# Altium PCB WEB_PCB.PcbDoc (part 2 of 2)
Units mil, origin at the board's own origin, x right, y up, seen from the top; angles counter-clockwise.
Board outline 3858.27 x 2755.91 mil, 2 copper layers (Top Layer, Bottom Layer); 107 components, 108 nets, 503 pads, 381 vias.
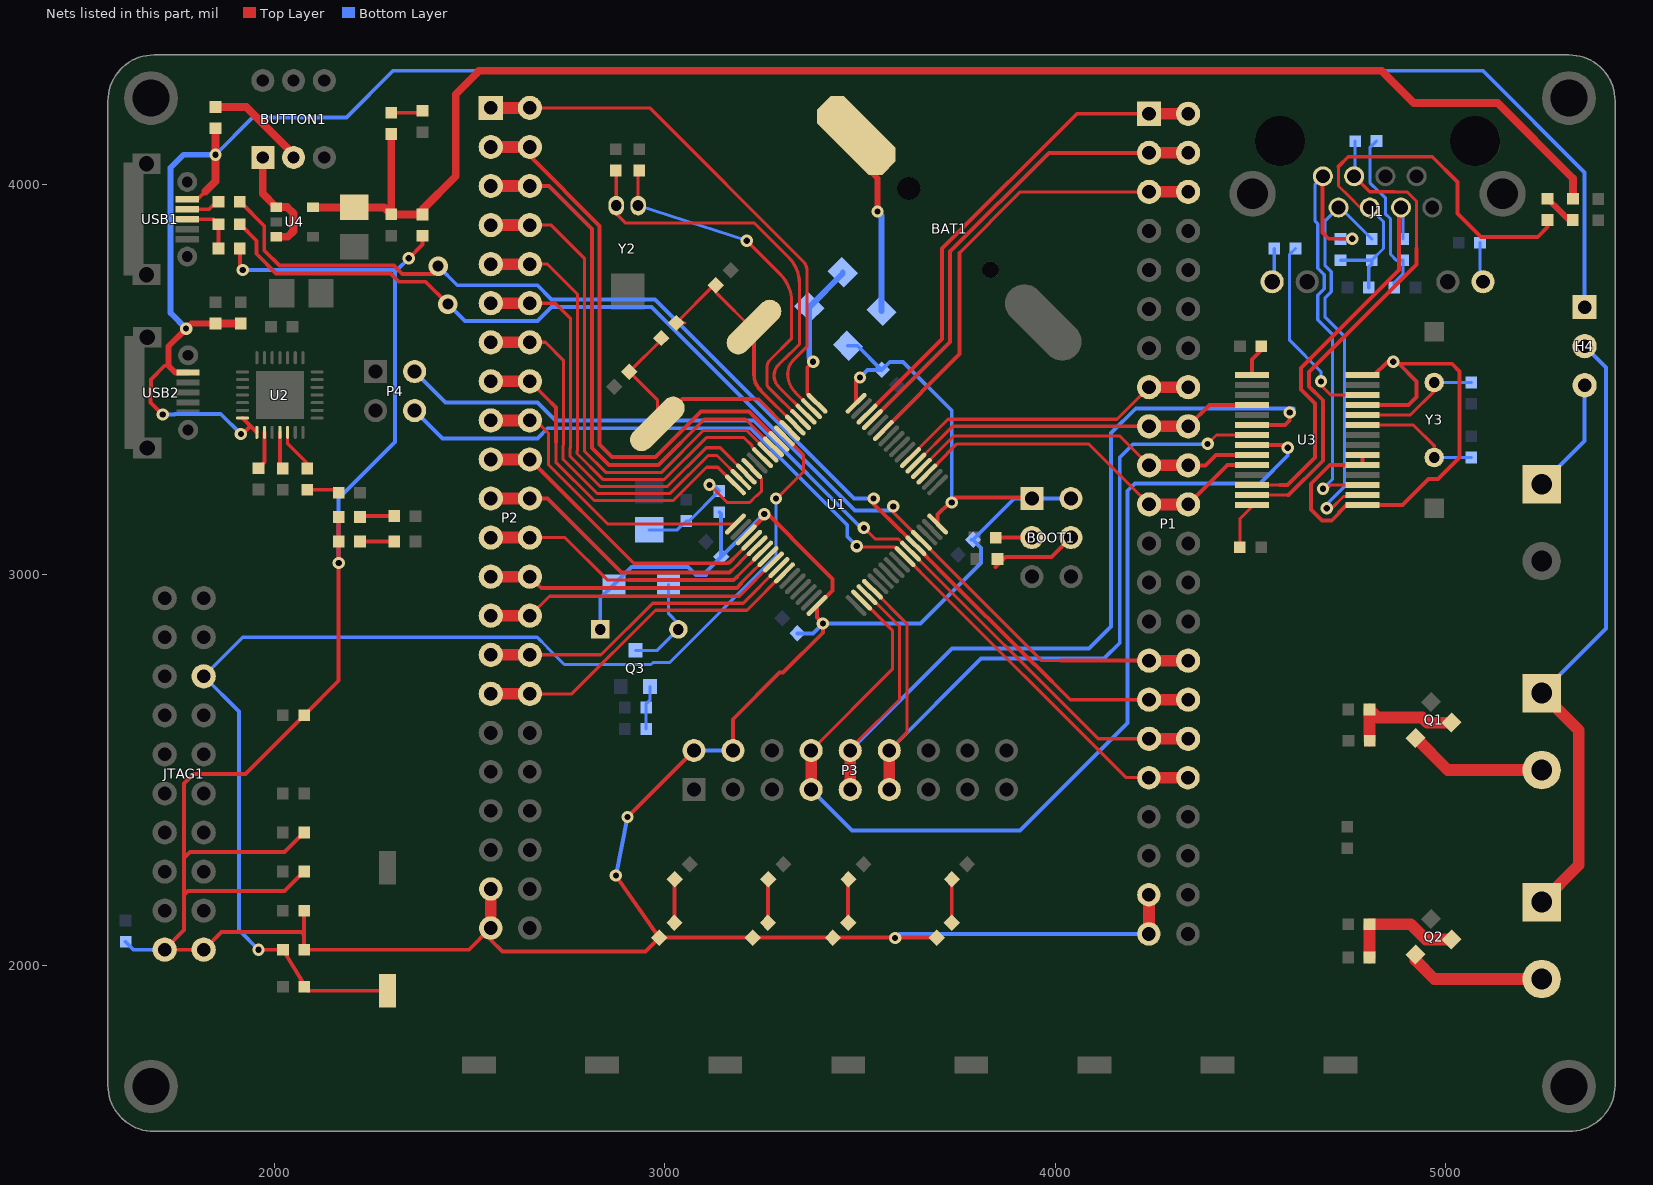
[diagram p2: the nets of this part, all layers, seen from the top]

## Via types
v1: diameter 31.5, hole 15.75, Top Layer to Bottom Layer, 370 vias
v2: diameter 19.68, hole 7.87, Top Layer to Bottom Layer, 9 vias
v3: diameter 50, hole 28, Top Layer to Bottom Layer, 2 vias

## Nets (pads, with @x,y where several pads share a name; then routed paths per layer and width w, separated by ;. In a path a pad name is that pad's centre, name@x,y a point inside that pad or via, vN(x,y) a via of type N, cw(c..) or ccw(c..) an arc to the next point about the centre after c; other vN are vias at no path point) (continued)
LEDB: R31.2 U3.26 | length 506.5
  Top Layer w8: v1(4680,3495) 4680,3485 4705,3460 4786.57,3460 U3.26@4786.73,3460.16
  Bottom Layer w8: R31.2@4615,3835 4600,3820 4600,3600 4680,3520 v1(4680,3495)
NET_INT: P1.17 P1.18 U1.53 U3.4 | length 921.7
  Top Layer w8: U1.53@3643.22,3285.79 3737.44,3380 P1.17@4240,3380
  Top Layer w10: P1.18@4340,3380 4394.57,3434.57 U3.4@4503.27,3434.57
  Top Layer w30: P1.17@4240,3380 P1.18@4340,3380
NET_RST: P1.21 P1.22 U1.51 U3.10 | length 971.3
  Top Layer w8: U1.51@3671.06,3257.95 3672.95,3257.95 3698.87,3283.87 3698.87,3285.74 3748.13,3335 4085,3335 P1.21@4240,3180
  Top Layer w10: P1.22@4340,3180 4441.02,3281.02 U3.10@4503.27,3281.02
  Top Layer w30: P1.21@4240,3180 P1.22@4340,3180
NET_SPI_CS: P1.19 P1.20 U1.52 U3.9 | length 922.6
  Top Layer w8: U1.52@3657.14,3271.87 3740.27,3355 4165,3355 P1.19@4240,3280
  Top Layer w10: P1.20@4340,3280 4385,3280 4411.61,3306.61 U3.9@4503.27,3306.61
  Top Layer w30: P1.19@4240,3280 P1.20@4340,3280
NET_SPI_MISO: P3.9 P3.10 U1.35 U3.6 | length 2511.1
  Top Layer w8: P3.10@3475,2550 3475,2555 3495.53,2575.53 3495.98,2575.53 3601,2680.54 3601,2868.27 3520.33,2948.94 U1.35@3517.95,2948.94
  Top Layer w10: U3.6@4503.27,3383.39 4588.39,3383.39 4600,3395 v1(4600,3415)
  Top Layer w30: P3.9@3475,2450 P3.10@3475,2550
  Bottom Layer w10: P3.10@3475,2550 3736,2811 4086,2811 4142.5,2867.5 4142.5,3362.5 4206,3426 4359.05,3426 4360.05,3425 4610,3425 v1(4600,3415)
NET_SPI_MOSI: P3.11 P3.12 U1.36 U3.7 | length 2109.1
  Top Layer w8: U1.36@3531.87,2962.86 3620,2874.73 3620,2595 P3.12@3575,2550 ; v1(4390,3335) 4412.8,3357.8 U3.7@4503.27,3357.8
  Top Layer w30: P3.11@3575,2450 P3.12@3575,2550
  Bottom Layer w10: P3.12@3575,2550 3810,2785 4125,2785 4165,2825 4165,3300 4199,3334 4389,3334 v1(4390,3335)
NET_SPI_SCK: P3.7 P3.8 U1.34 U3.8 | length 2729.1
  Top Layer w8: P3.8@3375,2550 3583,2758 3583,2857.46 3505.44,2935.02 U1.34@3504.03,2935.02
  Top Layer w10: U3.8@4503.27,3332.2 4587.8,3332.2 v1(4595,3325)
  Top Layer w30: P3.7@3375,2450 P3.8@3375,2550
  Bottom Layer w10: P3.7@3375,2450 3480,2345 3910,2345 4185,2620 4185,3215 4204,3234 4524,3234 4595,3305 v1(4595,3325)
NetBAT1_1: BAT1.1 D1.1 | length 476.2
  Top Layer w15: BAT1.1@3490.54,4124.46 3490.54,4069.46 3545,4015 v1(3545,3930)
  Bottom Layer w15: v1(3545,3930) 3555,3920 D1.1@3555,3675
NetBEEP1_2: BEEP1.2 D3.1 Q3.3 | length 242.6
  Bottom Layer w8: Q3.3@2925,2806.26 2981.26,2806.26 BEEP1.2@3035,2860 ; D3.1@3010,2975 3010,2900 BEEP1.2@3035,2875
NetBOOT1_3: BOOT1.3 R6.2 | length 92.5
  Top Layer w10: R6.2@3847.5,3094.94 3847.56,3095 BOOT1.3@3940,3095
NetBOOT1_4: BOOT1.4 R8.1 | length 224.1
  Top Layer w10: 3847,3020 3872,3045 3990,3045 BOOT1.4@4040,3095
NetBUTTON1_1: BUTTON1.1 U4.1 U4.3 | length 287.4
  Top Layer w20: BUTTON1.1@1971.26,4068.15 1971.26,3975.74 U4.1@2006,3941 2034,3941 2050,3925 2050,3880 2035,3865 U4.3@2006,3865
NetBUTTON1_2: BUTTON1.2 F1.2 | length 258.6
  Top Layer w20: F1.2@1850.06,4197.5 1929.25,4197.5 2050,4076.75 BUTTON1.2@2050,4068.15
NetC13_2: C13.2 U3.1 | length 83.6
  Top Layer w10: U3.1@4503.27,3511.34 4503.27,3550.77 4527.5,3575 C13.2@4527.5,3584.94
NetC18_1: C18.1 U3.24 Y3.2 | length 325.6
  Top Layer w8: U3.24@4786.73,3408.98 4908.98,3408.98 4970,3470 Y3.2@4970,3492.13
  Bottom Layer w8: Y3.2@4970,3492.13 4970.13,3492 C18.1@5064.87,3492
NetC19_1: C19.1 U3.23 Y3.1 | length 330.4
  Top Layer w8: U3.23@4786.73,3383.39 4916.61,3383.39 4970,3330 Y3.1@4970,3300
  Bottom Layer w8: Y3.1@4970,3300 C19.1@5065,3300
NetC20_2: C20.2 J1.4 L2.1 R20.1 R21.1 | length 1173.8
  Top Layer w8: 4725,4045 4725,3995 4740.41,3979.59 4741.4,3979.59 4764.59,3956.4 4764.59,3955.41 4780,3940 J1.4@4805,3940
  Top Layer w10: 4725,4045 4750,4070 4965,4070 5030,4005 5030,3925 5090,3865 5235,3865 5260,3890 L2.1@5260,3908
  Bottom Layer w8: R20.1@4730,3805 R21.1@4810,3805 4840,3835 4840,3903.55 4805,3938.55 J1.4@4805,3940
  Bottom Layer w10: C20.2@4802.5,3735.06 4802.5,3787.5 4810,3795 R21.1@4810,3805
NetC21_2: C21.2 R22.1 R23.1 | length 436.8
  Bottom Layer w8: R22.1@4822,4110 4805.41,4093.41 4805.41,4003.6 4828.6,3980.41 4829.59,3980.41 4845,3965 4845,3924.01 4858,3911.01 4858,3820 4873,3805 R23.1@4890,3805 4890,3770 4867.5,3747.5 C21.2@4867.5,3735
NetH1_1: H1.1 H3.1 H4.2 | length 1593
  Top Layer w30: H3.1@5245,2161.85 5340,2256.85 5340,2601.85 H1.1@5245,2696.85
  Bottom Layer w10: H1.1@5245,2696.85 5410,2861.85 5410,3530 H4.2@5355,3585
NetH1_2: H1.2 Q1.3 | length 356.8
  Top Layer w30: Q1.3@4922.29,2582.29 5004.58,2500 H1.2@5245,2500
NetH2_1: H2.1 H4.3 | length 298.7
  Bottom Layer w10: H2.1@5245,3231.85 5355,3341.85 H4.3@5355,3485
NetH3_2: H3.2 Q2.3 | length 357.1
  Top Layer w30: Q2.3@4922.29,2027.29 4922.29,2012.71 4970,1965 H3.2@5245,1965
NetJ1_9: J1.9 R31.1 | length 87.2
  Bottom Layer w8: J1.9@4555,3750 4560.5,3755.5 R31.1@4560.5,3834.94
NetJ1_12: J1.12 R30.1 | length 103.3
  Bottom Layer w8: R30.1@5087,3850 5087,3758 J1.12@5095,3750
NetL2_2: L2.2 R25.1 | length 87.6
  Top Layer w15: L2.2@5260.06,3962.5 5260.25,3962.5 5292.5,3930.25 5292.5,3930.06 5314.56,3908 R25.1@5324.94,3908
NetLED1_1: LED1.1 R15.2 | length 83.6
  Top Layer w10: R15.2@2084.94,3217.5 2153.13,3217.5 2160.5,3210.13 LED1.1@2165.5,3210.13
NetLED2_2: LED2.2 R17.2 | length 87.5
  Top Layer w10: LED2.2@2220,3085 2307.44,3085 R17.2@2307.5,3085.06
NetLED3_2: LED3.2 R18.2 | length 87.5
  Top Layer w10: LED3.2@2220,3150 2307.44,3150 R18.2@2307.5,3150.06
NetLED4_2: LED4.2 R35.2 | length 111.4
  Top Layer w10: LED4.2@3025,2109.4 3025,2220.09 R35.2@3025.51,2220.6
NetLED5_2: LED5.2 R36.2 | length 111.6
  Top Layer w10: LED5.2@3264.49,2109.4 3264.49,2219.58 R36.2@3265.51,2220.6
NetLED6_2: LED6.2 R37.2 | length 111.6
  Top Layer w10: LED6.2@3469.49,2109.4 3469.49,2219.58 R37.2@3470.51,2220.6
NetLED7_2: LED7.2 R38.2 | length 111.4
  Top Layer w10: LED7.2@3735,2109.4 3735,2220.09 R38.2@3735.51,2220.6
NetLED8_2: LED8.2 R39.2 | length 82.1
  Top Layer w10: LED8.2@2300.06,4182.5 2375.06,4182.5 R39.2@2380.06,4187.5
NetQ1_1: Q1.1 R24.1 R27.2 | length 303.9
  Top Layer w30: R27.2@4805,2574.94 4804.5,2575.44 R24.1@4804.5,2655 4825.19,2634.31 4939.31,2634.31 4952.36,2621.26 Q1.1@5014.16,2621.26
NetQ2_1: Q2.1 R28.1 R29.1 | length 310.7
  Top Layer w30: R29.1@4804.5,2020 R28.1@4804.5,2105 4910,2105 4948.74,2066.26 Q2.1@5014.16,2066.26
NetQ3_1: Q3.1 R33.2 R34.2 | length 112.8
  Bottom Layer w8: R33.2@2952.5,2605.06 R34.2@2952.5,2660.06 2952.5,2670 2962.4,2679.9 Q3.1@2962.4,2713.74
NetR10_1: R10.1 USB1.2 | length 90.3
  Top Layer w10: USB1.2@1777.8,3935.59 1833.59,3935.59 R10.1@1858,3960
NetR11_1: R11.1 R13.1 USB1.3 | length 147.9
  Top Layer w10: USB1.3@1777.8,3910 1845.5,3910 R11.1@1858,3897.5 R13.1@1858,3835
NetR12_2: R12.2 U3.14 | length 121.3
  Top Layer w8: R12.2@4472.5,3070.06 4472.5,3142.5 4503.27,3173.27 U3.14@4503.27,3178.66
NetR14_2: R14.2 U2.9 | length 98.5
  Top Layer w10: R14.2@1960.06,3272.5 1975.63,3288.07 U2.9@1975.63,3364.53
NetR15_1: R15.1 U2.12 | length 113.4
  Top Layer w8: U2.12@2034.68,3364.53 2034.68,3335.32 2085,3285 R15.1@2085,3272
NetR16_1: R16.1 U2.11 | length 95.7
  Top Layer w10: U2.11@2015,3364.53 2015,3279.56 R16.1@2022.56,3272
OSC32_IN: C3.2 U1.3 Y2.2 | length 1065.8
  Top Layer w8: C3.2@2875,4035 2876,4034 Y2.2@2876,3945 2876,3924 2900,3900 3230,3900 3316.72,3813.28 cw(c3248.43,3745) 3345,3745 3345,3590 3320.86,3565.86 3320.04,3565.86 3291.56,3537.38 ccw(c3319.48,3509.47) 3280,3509.47 ccw(c3319.48,3509.47) 3291.56,3481.55 U1.3@3362.05,3411.06
OSC32_OUT: C4.2 U1.4 Y2.1 | length 1053.8
  Top Layer w8: Y2.1@2932,3945 2932,4032 C4.2@2935,4035 ; v1(3210,3855) 3295.71,3769.29 cw(c3225,3698.58) 3325,3698.58 3325,3605 3269.64,3549.64 ccw(c3289.28,3530) 3261.5,3530 3261.5,3489.1 ccw(c3274.38,3489.1) 3265.27,3480 U1.4@3348.13,3397.14
  Bottom Layer w8: Y2.1@2932,3945 v1(3210,3855)
OSC_IN: C1.2 R7.2 U1.5 Y1.2 | length 611.8
  Top Layer w8: 3051.66,3644.4 R7.2@3029.49,3644.4 3125.69,3740.6 C1.2@3130.51,3740.6 3130.51,3723.25 3228.76,3625 Y1.2@3228.76,3634 ; 3245,3472.44 U1.5@3334.21,3383.22
  Top Layer w10: Y1.2@3228.76,3625 3228.76,3511.64 ccw(c3284.2,3511.64) 3245,3472.44
OSC_OUT: C2.2 R7.1 U1.6 Y1.1 | length 682.3
  Top Layer w8: C2.2@2909.45,3519.35 2990.91,3600.82 R7.1@2990.91,3605.91 ; C2.2@2909.49,3519.31 2981.24,3447.56 Y1.1@2981.24,3386 ; 3220,3450 3239.6,3450 U1.6@3320.29,3369.3
  Top Layer w10: Y1.1@2981.24,3386 3045.24,3450 3220,3450
PA0: P2.11 P2.12 U1.14 | length 1125.4
  Top Layer w8: P2.12@2655,3695 2720,3695 2758.55,3656.45 2758.55,3324.67 2757.55,3323.67 2757.55,3302.9 2834.35,3226.1 3007.17,3226.1 3106.07,3325 3141.89,3325 U1.14@3208.94,3257.95
  Top Layer w30: P2.11@2555,3695 P2.12@2655,3695
PA1: P2.13 P2.14 U1.15 | length 1015.9
  Top Layer w8: P2.14@2655,3595 2695,3595 2740.55,3549.45 2740.55,3332.13 2739.55,3331.13 2739.55,3295.44 2826.89,3208.1 3014.63,3208.1 3111.52,3305 3134.05,3305 U1.15@3195.02,3244.03
  Top Layer w30: P2.13@2555,3595 P2.14@2655,3595
PA2: P2.15 P2.16 U1.16 | length 888.4
  Top Layer w8: P2.16@2655,3495 2710,3440 ; 2721.55,3340 2721.55,3287.99 2819.43,3190.1 3022.08,3190.1 3106.98,3275 3136.21,3275 U1.16@3181.1,3230.11
  Top Layer w10: 2710,3440 2721.55,3428.45 2721.55,3340
  Top Layer w30: P2.15@2555,3495 P2.16@2655,3495
PA3: P2.17 P2.18 U1.17 | length 783.3
  Top Layer w8: P2.18@2655,3395 2670,3395 2702.55,3362.45 2702.55,3281.53 2854.19,3129.89 U1.17@3181.1,3129.89
  Top Layer w30: P2.17@2555,3395 P2.18@2655,3395
PA4: P2.19 P2.20 U1.20 | length 802.3
  Top Layer w8: 3174.54,3040 3222.68,3088.13 U1.20@3222.86,3088.13
  Top Layer w10: P2.20@2655,3295 2920.75,3029.25 3161.15,3029.25 3162.9,3031 3165.54,3031 3174.54,3040
  Top Layer w30: P2.19@2555,3295 P2.20@2655,3295
PA5: P2.21 P2.22 U1.21 | length 789.7
  Top Layer w8: 3171.18,3011 3172.41,3011 3193.54,3032.13 3193.54,3033.36 3234.39,3074.21 U1.21@3236.78,3074.21
  Top Layer w10: P2.22@2655,3195 2700,3195 2889.75,3005.25 2890.5,3006 3166.18,3006 3171.18,3011
  Top Layer w30: P2.21@2555,3195 P2.22@2655,3195
PA6: P2.23 P2.24 U1.22 | length 771.6
  Top Layer w8: P2.24@2655,3095 2745,3095 2854,2986 2908.85,2986 ; 3185,2994.6 U1.22@3250.7,3060.29
  Top Layer w10: 2908.85,2986 3176.4,2986 3185,2994.6
  Top Layer w30: P2.23@2555,3095 P2.24@2655,3095
PA7: P2.25 P2.26 U1.23 | length 755.6
  Top Layer w8: 3195,2977.73 3204,2986.73 3204,2987.19 3263.18,3046.37 U1.23@3264.62,3046.37
  Top Layer w10: P2.26@2655,2995 2684,2966 3184.69,2966 3195.71,2977.02
  Top Layer w30: P2.25@2555,2995 P2.26@2655,2995
PA9: P1.35 P1.36 P4.4 U1.42 | length 2409.9
  Top Layer w8: v1(3491.88,3073.12) 3493.76,3071.24 3588,3071.24 3603.18,3056.06 3608.08,3056.06 3612.87,3051.27 3612.87,3047.94 3613.82,3047.94 U1.42@3615.38,3046.37 3633.43,3028.32 3633.57,3028.32 3654.66,3007.24 3654.66,3007.1 4181.33,2480.43 P1.35@4239.57,2480.43
  Top Layer w30: P1.35@4239.57,2480.43 P1.36@4339.57,2480.43
  Bottom Layer w10: P4.4@2360,3420 2431,3349 2674.05,3349 2700.05,3375 3220,3375 3467.5,3127.5 3467.5,3097.5 v1(3491.88,3073.12)
PA10: P1.33 P1.34 P4.2 U1.43 | length 2369.5
  Top Layer w8: v1(3510,3120) 3538.76,3091.24 3598.67,3091.24 3619.14,3070.77 3619.14,3070.45 U1.43@3629.3,3060.29 4109.6,2580 P1.33@4240,2580
  Top Layer w30: P1.33@4240,2580 P1.34@4340,2580
  Bottom Layer w10: P4.2@2360,3520 2439,3441 2674.05,3441 2720.05,3395 3228.28,3395 3503.28,3120 v1(3510,3120)
PA11: P1.31 P1.32 R10.2 U1.44 | length 2998.7
  Top Layer w10: R10.2@1912.5,3954.94 1975,3892.44 1975,3830 2013.58,3791.42 2306.87,3791.42 2328.28,3770 v3@2410,3770 ; v1(3535,3195) 3535,3181.52 3572.26,3144.25 3573.18,3144.25 U1.44@3643.22,3074.21 ; U1.44@3642.9,3073.88 3701.47,3015.31 3701.47,3015 3946.47,2770 3948.28,2770 4038.28,2680 P1.31@4240,2680
  Top Layer w30: P1.31@4240,2680 P1.32@4340,2680
  Bottom Layer w10: v3(2420,3790) 2469,3741 2674.05,3741 2710.05,3705 2974.85,3705 3484.85,3195 v1(3535,3195)
PA12: P1.29 P1.30 R11.2 U1.45 | length 2963
  Top Layer w8: v1(3585,3175) 3585,3160.27 U1.45@3657.14,3088.13 3965.27,2780 4015,2780
  Top Layer w10: R11.2@1912.5,3897.44 1955,3854.94 1955,3821.72 2005.3,3771.42 2298.58,3771.42 2320,3750 2387.5,3750 v3(2445,3692.5) ; 4015,2780 P1.29@4240,2780
  Top Layer w30: P1.29@4240,2780 P1.30@4340,2780
  Bottom Layer w10: v3(2445,3692.5) 2488.5,3649 2674.05,3649 2710.05,3685 2966.57,3685 3487.32,3164.25 3584.25,3164.25 3585,3165 v1(3585,3175)
PB0: P2.31 P2.32 U1.26 | length 879.6
  Top Layer w8: P2.32@2655,2695 2762.5,2695 2976.5,2909 3210.76,2909 U1.26@3306.37,3004.62
  Top Layer w30: P2.31@2555,2695 P2.32@2655,2695
PB7: P1.5 P1.6 U1.59 | length 1185.5
  Top Layer w8: 3755.08,3823.16 3755.08,3824.58 3910.5,3980 P1.5@4240,3980
  Top Layer w10: U1.59@3559.71,3369.3 3755.08,3564.68 3755.08,3823.16
  Top Layer w30: P1.5@4240,3980 P1.6@4340,3980
PB8: P1.3 P1.4 U1.61 | length 1226.6
  Top Layer w8: U1.61@3531.87,3397.14 U1.61@3532.31,3397.14
  Top Layer w10: U1.61@3532.31,3397.14 3730.89,3595.72 3730.89,3827.25 3983.63,4080 P1.3@4240,4080
  Top Layer w30: P1.3@4240,4080 P1.4@4340,4080
PB9: P1.1 P1.2 U1.62 | length 1276.2
  Top Layer w10: U1.62@3517.95,3411.06 3710,3603.11 3710,3834.65 4055.35,4180 P1.1@4240,4180
  Top Layer w30: P1.1@4240,4180 P1.2@4340,4180
PC0: P2.3 P2.4 U1.8 | length 1488.2
  Top Layer w10: P2.4@2655,4095 2655,4071.72 2833.55,3893.16 2833.55,3332.96 2865.41,3301.1 2976.1,3301.1 3093,3418 3215.92,3418 U1.8@3292.45,3341.47
  Top Layer w30: P2.3@2555,4095 P2.4@2655,4095
PC1: P2.5 P2.6 U1.9 | length 1425
  Top Layer w8: 3173,3398 3207,3398 3277.45,3327.55 U1.9@3278.53,3327.55
  Top Layer w10: P2.6@2655,3995 2703.43,3995 2813.55,3884.88 2813.55,3324.68 2857.13,3281.1 2984.39,3281.1 3101.28,3398 3173,3398
  Top Layer w30: P2.5@2555,3995 P2.6@2655,3995
PC2: P2.7 P2.8 U1.10 | length 1328.9
  Top Layer w8: P2.8@2655,3895 2710,3895 2794.55,3810.45 2794.55,3316.81 2849.26,3262.1 2992.26,3262.1 3099.15,3369 3210.54,3369 3264.62,3314.93 U1.10@3264.62,3313.63
  Top Layer w30: P2.7@2555,3895 P2.8@2655,3895
PC3: P2.9 P2.10 U1.11 | length 1232
  Top Layer w8: P2.10@2655,3795 2700,3795 2776.55,3718.45 2776.55,3317.22 2775.55,3316.22 2775.55,3310.35 2841.8,3244.1 2999.71,3244.1 3106.61,3351 3203.09,3351 3223.95,3330.14 3223.95,3326.46 U1.11@3250.7,3299.71
  Top Layer w30: P2.9@2555,3795 P2.10@2655,3795
PC4: P2.27 P2.28 U1.24 | length 780.5
  Top Layer w8: P2.28@2655,2895 2705,2945 3190.65,2945 3278.11,3032.45 U1.24@3278.53,3032.45
  Top Layer w30: P2.27@2555,2895 P2.28@2655,2895
PC5: P2.29 P2.30 U1.25 | length 830
  Top Layer w8: P2.30@2655,2795 2837.04,2795 2969.04,2927 3200.92,2927 U1.25@3292.45,3018.53
  Top Layer w30: P2.29@2555,2795 P2.30@2655,2795
PC13: P2.1 P2.2 U1.2 | length 1421.1
  Top Layer w8: P2.2@2655,4195 2961.85,4195 3354.89,3801.96 cw(c3332.93,3780) 3363.99,3780 3363.99,3583.53 3329.36,3548.9 ; U1.2@3375.97,3424.98 3335,3465.95 cw(c3383.28,3514.24) 3315,3514.24 ; 3315,3514.24 cw(c3364.03,3514.24) 3329.34,3548.88 ; 3315,3514.24 cw(c3364.03,3514.24) 3329.36,3548.9
  Top Layer w30: P2.1@2555,4195 P2.2@2655,4195
PD2: P1.15 P1.16 U1.54 | length 787.3
  Top Layer w8: U1.54@3629.3,3299.71 3629.3,3300.7 3628.61,3301.39 3725.21,3398 4158,3398 P1.15@4240,3480
  Top Layer w30: P1.15@4240,3480 P1.16@4340,3480
RESET: C6.2 JTAG1.15 K1.2 R9.1 U1.7 | length 3169.9
  Top Layer w8: v1(3285,3195) 3287.07,3195 3355,3262.93 3355,3306.76 U1.7@3306.37,3355.38
  Top Layer w10: v1(1960,2040) R9.1@2023,2040 2080.28,1946.64 C6.2@2087.4,1935.04 ; C6.2@2077.5,1944.94 C6.2@2087.4,1935.04 ; K1.2@2290,1935.04 C6.2@2087.4,1935.04
  Bottom Layer w8: JTAG1.15@1820,2740 1920,2840 2673.64,2840 2700,2813.64 2700,2813.13 2743.13,2770 2965,2770 2970,2775 3012.52,2775 3284.75,3047.23 3284.75,3194.75 v1(3285,3195) v1@3284.75,3195
  Bottom Layer w10: JTAG1.15@1820,2740 1910,2650 1910,2090 v1(1960,2040)
TPIN+: J1.3 R22.2 U3.13 | length 1288.4
  Top Layer w8: U3.13@4503.27,3204.25 4595.16,3204.25 ; J1.3@4765,4020 4804.59,3980.41 4867.78,3980.41 4868.6,3979.59 4901.4,3979.59 4924.59,3956.4 4924.59,3835
  Top Layer w10: 4595.16,3204.25 4597.48,3204.25 4685,3291.77 4685,3446.52 4649.25,3482.26 4649.25,3519.25 4924.59,3794.59 4924.59,3835
  Bottom Layer w8: J1.3@4765,4020 4767.5,4022.5 R22.2@4767.5,4109.94
TPIN-: J1.6 R23.2 U3.12 | length 1034
  Top Layer w8: U3.12@4503.27,3229.84 4575,3229.84
  Top Layer w10: 4575,3229.84 4594.79,3229.84 4665,3300.05 4665,3438.23 4629.25,3473.98 4629.25,3529.25 4879.54,3779.54 4879.54,3934.54 J1.6@4885,3940
  Bottom Layer w8: J1.6@4885,3940 4889.94,3935.06 R23.2@4889.94,3859.5
TPOUT+: J1.1 R20.2 U3.17 | length 1213.9
  Top Layer w8: v1(4685.16,3220) 4695.31,3220 4705.16,3229.84 U3.17@4786.73,3229.84
  Top Layer w10: J1.1@4685,4020 4684.41,4020 4684.41,3875.59 4700,3860 v1(4760,3860)
  Bottom Layer w8: J1.1@4685,4020 4665,4000 4665,3905 4672,3898 4672,3784.56 4688.53,3768.03 4688.53,3731.97 4672,3715.44 4672,3652.54 4710,3614.54 4710,3245 4685.16,3220.16 v1(4685.16,3220)
  Bottom Layer w10: R20.2@4729.94,3859.5 4730.44,3860 v1(4760,3860)
TPOUT-: J1.2 R21.2 U3.16 | length 1061.7
  Top Layer w8: v1(4695,3170) 4707.48,3170 4737.63,3200.14 4782.62,3200.14 U3.16@4786.73,3204.25
  Bottom Layer w8: v1(4695,3170) 4695,3180 4740,3225 4740,3610 4690,3660 4690,3707.99 4706.53,3724.51 4706.53,3775.49 4690,3792.01 4690,3905 J1.2@4725,3940 4729.44,3940 R21.2@4809.94,3859.5
VBAT: D1.2 D2.2 U1.1 | length 391.4
  Top Layer w10: v1(3380,3545) 3365,3530 3365,3463.79 U1.1@3389.89,3438.9
  Bottom Layer w15: v1(3380,3545) 3370,3555 D2.2@3370,3685 3456.01,3771.01 D1.2@3456.01,3773.99
VBUS: C15.1 C16.1 F1.1 H4.1 U2.7 U2.8 USB1.1 USB2.1 | length 5616.8
  Top Layer w10: v1(1715,3410) 1684.25,3440.75 1684.25,3477.74 1685,3478.48 1685,3500 1720,3535 1730,3535 ; USB1.1@1777.8,3961.18 1803.9,3961.18 1823.86,3981.14 ; v1(1915,3360) 1919.53,3360 1940,3380.47 ; U2.7@1919.53,3400.94 1940,3380.47 ; U2.8@1955.63,3364.53 1955.63,3364.84 1940,3380.47
  Top Layer w15: USB2.1@1780,3517.36 1747.64,3517.36 1730,3535 1730,3585 v1(1775,3630) 1788,3643 C15.1@1850,3643
  Top Layer w20: 1823.86,3981.14 1850,4007.28 v1(1850,4075.14) F1.1@1850,4143 ; C15.1@1850,3643 C16.1@1915,3643
  Bottom Layer w10: v1(1715,3410) 1745,3410 1746.3,3411.3 1863.7,3411.3 v1(1915,3360) ; v1(1850,4075.14) 1944.86,4170 2185,4170 2305,4290 5095,4290 5355,4030 H4.1@5355,3685
  Bottom Layer w15: v1(1775,3630) 1734.7,3670.3 1734.7,4041.81 1768.04,4075.14 v1(1850,4075.14)
VCC_3V3: BEEP1.1 BOOT1.1 BOOT1.2 C5.1 C7.2 C8.2 C9.2 C10.2 D2.1 D3.2 JTAG1.1 JTAG1.2 L1.2 LED2.1 LED3.1 LED4.1 LED5.1 LED6.1 LED7.1 P1.41 P1.43 P2.41 P2.43 P3.2 P3.4 R2.1 R3.1 R4.1 R5.1 R9.2 R13.2 R26.2 U1.19 U1.32 U1.48 U1.64 | length 10790.4
  Top Layer w10: R13.2@1912.5,3834.94 1912.5,3787.5 v1(1920,3780) ; R2.1@2077,2140 2077,2078 ; R3.1@2077,2240 2076.72,2240 2026.72,2190 1780,2190 1770,2180 ; R4.1@2077,2340 2027,2290 1785,2290 1770,2275 ; LED3.1@2165.5,3147.6 v1(2165.5,3030) 2165.5,2728.5 R5.1@2077,2640 1927,2490 1795,2490 1770,2465 1770,2275 ; v1(2345,3810) 2380,3845 R26.2@2380,3867.5 ; v1(2875,2230) LED4.1@2986.42,2070.91 ; v1(2905,2380) P3.2@3075,2550 ; P3.4@3175,2550 3175,2630 3294.25,2749.25 3302.74,2749.25 3405,2851.52 v1(3405,2875) 3389.89,2890.11 U1.32@3389.89,2921.1 3391.1,2921.1 3430,2960 3430,2988.71 3325,3093.71 3325,3095 3265,3155 v1(3255,3155) 3255,3151.89 3256.89,3150 U1.19@3208.94,3102.05 ; U1.64@3490.11,3438.9 3490.11,3495.11 v1(3500,3505) ; LED7.1@3696.42,2070.91 LED6.1@3430.91,2070.91 LED5.1@3225.91,2070.91 LED4.1@2986.42,2070.91 ; U1.48@3698.9,3129.89 3698.9,3153.9 3730,3185 v1(3735,3185) 3735,3190 3742.75,3197.75 3937.25,3197.75 BOOT1.1@3940,3195 BOOT1.1@3934.25,3189.25 ; P1.43@4230.06,2070.91 P1.43@4239.57,2080.43 ; 1770,2180 1770,2090 JTAG1.2@1720,2040 JTAG1.1@1820,2040 1865,2085 2070,2085 2077,2078 ; 1770,2180 1770,2275 ; 2077,2078 2077,2040.44 R9.2@2077.5,2039.94 2499.09,2039.94 P2.43@2554.57,2095.43 2554.57,2065.43 2585,2035 2950.51,2035 LED4.1@2986.42,2070.91
  Top Layer w30: P2.43@2554.57,2095.43 P2.41@2554.57,2195.43 ; P1.43@4239.57,2080.43 P1.41@4239.57,2180.43
  Bottom Layer w10: C5.1@1620.06,2060.5 1640.56,2040 JTAG1.2@1720,2040 ; v1(1920,3780) 2315,3780 ; v1(2165.5,3030) 2165.5,3195.5 2310,3340 2310,3775 2315,3780 ; v1(2345,3810) 2315,3780 ; BEEP1.1@2835,2860 2835,2940 D3.2@2870,2975 2915,3020 3060,3020 3080.6,2999.4 3105.51,2999.4 3105.51,3006.62 C10.2@3144.49,3045.6 ; v1(2875,2230) v1(2905,2380) ; P3.2@3075,2550 P3.4@3175,2550 ; L1.2@3140,3160 3144.49,3155.51 C10.2@3144.49,3045.6 ; v1(3255,3155) 3253.89,3155 C10.2@3144.49,3045.6 ; C7.2@3340,2850 3380,2850 v1(3405,2875) 3655,2875 3810,3030 3810,3068.89 C8.2@3789.4,3089.49 ; D2.1@3468.99,3586.01 3493.9,3586.01 C9.2@3555.51,3524.4 ; v1(3500,3505) 3519.4,3524.4 C9.2@3555.51,3524.4 ; v1(3590,2070) 3600.43,2080.43 P1.43@4239.57,2080.43 ; v1(3735,3185) 3735,3420 3610,3545 3576.11,3545 C9.2@3555.51,3524.4 ; C8.2@3785.51,3089.49 C8.2@3789.4,3089.49 ; BOOT1.2@4040,3195 BOOT1.1@3940,3195 3894.91,3195 C8.2@3789.4,3089.49
VCC_3V3_IN: C22.1 C23.2 LED8.1 R25.2 R26.1 U4.5 | length 3887.8
  Top Layer w20: U4.5@2100,3941 2100.8,3940.2 C22.1@2205,3940.2 2282.37,3940.2 C23.2@2300,3922.56 ; LED8.1@2300,4128 C23.2@2300,3922.56 ; R25.2@5325,3962.5 5325,4015 5132.5,4207.5 4917.5,4207.5 4835,4290 2525,4290 2465,4230 2465,4020 2380.06,3935.06 R26.1@2380.06,3922 2379.56,3922.5 C23.2@2300.06,3922.5 C23.2@2300,3922.56
VCC_ENC: U3.15 U3.19 U3.20 U3.25 U3.28 | length 1446.6
  Top Layer w10: U3.20@4786.73,3306.61 U3.19@4786.73,3281.02 4702.54,3281.02 4654.41,3232.89 4654.41,3167.11 4682.26,3139.25 4707.74,3139.25 4725.75,3157.26 4725.75,3159.45 4744.96,3178.66 U3.15@4786.73,3178.66 4888.66,3178.66 4955,3245 4980,3245 5035,3300 5035,3520 5015,3540 4880,3540 ; U3.25@4786.73,3434.57 4904.57,3434.57 4925,3455 4925,3495 4880,3540 ; U3.28@4786.73,3511.34 4816.34,3511.34 4850,3545 v1(4865,3545) 4875,3545 4880,3540
VCCA_3V3: C11.1 C12.2 L1.1 U1.13 | length 484.4
  Top Layer w8: v1(3115,3230) 3160,3185 3217.47,3185 3235.22,3202.75 3237,3202.75 3247.72,3213.47 3247.72,3247 U1.13@3222.86,3271.87
  Bottom Layer w8: C11.1@2960,3114.8 3032.37,3114.8 C12.2@3055.06,3137.5 3062.5,3137.5 3139.5,3214.5 L1.1@3139.94,3214.5 3124.44,3230 v1(3115,3230)
pads on no net: BAT1.0 BUTTON1.3 BUTTON1.4 BUTTON1.5 BUTTON1.6 J1.5 J1.7 J1.15 J1.16 JTAG1.11 JTAG1.17 JTAG1.19 U2.1 U2.2 U2.10 U2.13 U2.14 U2.15 U2.16 U2.17 U2.18 U2.19 U2.20 U2.21 U2.22 U2.23 U2.24 U2.27 U2.28 U3.3 U3.5 U4.4 USB1.4 USB2.4 Y3.
copper on no net: | length 4.8
  Top Layer w10: 1673.46,3763.46 1673.46,3768.27

## Polygon pours and split planes (outlines as drawn)
GND_ENC on Top Layer "Top Layer-No Net" (solid, pour order 0): 4415,4330.71 4419.29,4335 5435,4335
GND_ENC on Top Layer "Top Layer-No Net" (solid, remove dead copper, pour order 6): 4430,2985 4430,4115 5355,4115 5360,4110 5360,3925 5433.07,3925 5433.07,2981.93 5430,2985
GND on Top Layer "Top Layer-No Net" (solid, remove dead copper, pour order 12): 1574.8,1692.91 1574.8,4212.6 cw(c1692.91,4212.6) 1692.91,4330.71 5314.96,4330.71 cw(c5314.96,4212.6) 5433.07,4212.6 5433.07,1692.91 cw(c5314.96,1692.91) 5314.96,1574.8 1692.91,1574.8 cw(c1692.91,1692.91)
GND_ENC on Top Layer "Top Layer-No Net" (none, pour order 16): 4656.45,1848.55 4659.98,1852.08 4659.98,2230 cw(c4665,2230) 4665,2235.01 4787.92,2235.01 4789.98,2237.08 4789.98,2329.99 4665,2329.99 cw(c4665,2335) 4659.98,2335 4659.98,2509.99 4430,2509.99 cw(c4430,2515) 4424.98,2515 4424.98,2940 cw(c4430,2940) 4426.47,2943.56 4426.45,2943.55 4431.45,2948.55 4431.44,2948.53 cw(c4435,2945) 4435,2950.01 5428.07,2950.01 cw(c5428.07,2945) 5431.63,2948.53 5431.62,2948.55 5436.62,2943.55 5436.6,2943.56 cw(c5433.07,2940) 5438.09,2940 5438.09,1850 cw(c5433.07,1850) 5436.6,1846.44 5436.62,1846.45 5431.62,1841.45 5431.63,1841.47 cw(c5428.07,1845) 5428.07,1839.98 4660,1839.98 cw(c4660,1845)
GND_ENC on Bottom Layer "Top Layer-No Net" (solid, remove dead copper, pour order 8): 4430,2985 4430,4115 5355,4115 5360,4110 5360,3925 5433.07,3925 5433.07,2981.93 5430,2985
GND on Bottom Layer "Top Layer-No Net" (solid, remove dead copper, pour order 14): 1574.8,1692.91 1574.8,4212.6 cw(c1692.91,4212.6) 1692.91,4330.71 5314.96,4330.71 cw(c5314.96,4212.6) 5433.07,4212.6 5433.07,1692.91 cw(c5314.96,1692.91) 5314.96,1574.8 1692.91,1574.8 cw(c1692.91,1692.91)
GND_ENC on Bottom Overlay "Top Layer-No Net" (none): 4631.91,1845 4631.91,2230 cw(c4636.93,2230) 4636.93,2235.01 4764.85,2235.01 4766.91,2237.08 4766.91,2329.99 4641.93,2329.99 cw(c4641.93,2335) 4636.91,2335 4636.91,2507.92 4634.85,2509.99 4406.93,2509.99 cw(c4406.93,2515) 4401.91,2515 4401.91,2940 cw(c4406.93,2940) 4403.4,2943.56 4403.38,2943.55 4408.38,2948.55 4408.37,2948.53 cw(c4411.93,2945) 4411.93,2950.01 5405,2950.01 cw(c5405,2945) 5408.56,2948.53 5408.55,2948.55 5413.55,2943.55 5413.53,2943.56 cw(c5410,2940) 5415.02,2940 5415.02,1850 cw(c5410,1850) 5413.53,1846.44 5413.55,1846.45 5408.55,1841.45 5408.56,1841.47 cw(c5405,1845) 5405,1839.98 4636.93,1839.98 cw(c4636.93,1845)

## Keep-outs
Keep-Out Layer:
  the board outline again, w0.5

## Silkscreen, mask and mechanical layers (free items; w line width, h text height)
Top Overlay:
  circle w0.5: c1692.91,4212.6 r47.24
  circle w0.5: c5314.96,4212.6 r47.24
  circle w0.5: c5314.96,1692.91 r47.24
  circle w0.5: c1692.91,1692.91 r47.24
Bottom Overlay:
  lines w10: 5335,2945 5405,2945 ; 5410,2353.07 5410,2940 ; 5410,2360 5410,1850 ; 4406.93,2515 4426.93,2515 4641.93,2515 4641.93,2335 ; 4406.93,2515 4406.93,2940 ; 4406.93,2515 4636.93,2515 4641.93,2510 4641.93,2335 ; 4406.93,2515 4406.93,2940 ; 4406.93,2940 4411.93,2945 ; 4406.93,2940 4411.93,2945 ; 4411.93,2945 5405,2945 ; 4636.93,1845 5405,1845 ; 4636.93,1845 4636.93,2230 ; 4636.93,1845 5405,1845 ; 4636.93,1845 4636.93,2230 ; 4636.93,2230 4766.93,2230 4771.93,2235 4771.93,2335 4701.93,2335 4641.93,2335 ; 4636.93,2230 4775,2230 4785,2240 4785,2330 4780,2335 4641.93,2335 ; 5405,1845 5410,1850 ; 5405,1845 5410,1850 ; 5405,2945 5410,2940 ; 5405,2945 5410,2940 ; 5410,1850 5410,2940 ; 4430,2985 5430,2985 5433.07,2981.93 5433.07,3925 5360,3925 5360,4110 5355,4115 4430,4115 4430,2985